# EAGLE board CircularControllerSensors (EAGLE 8.0.0)
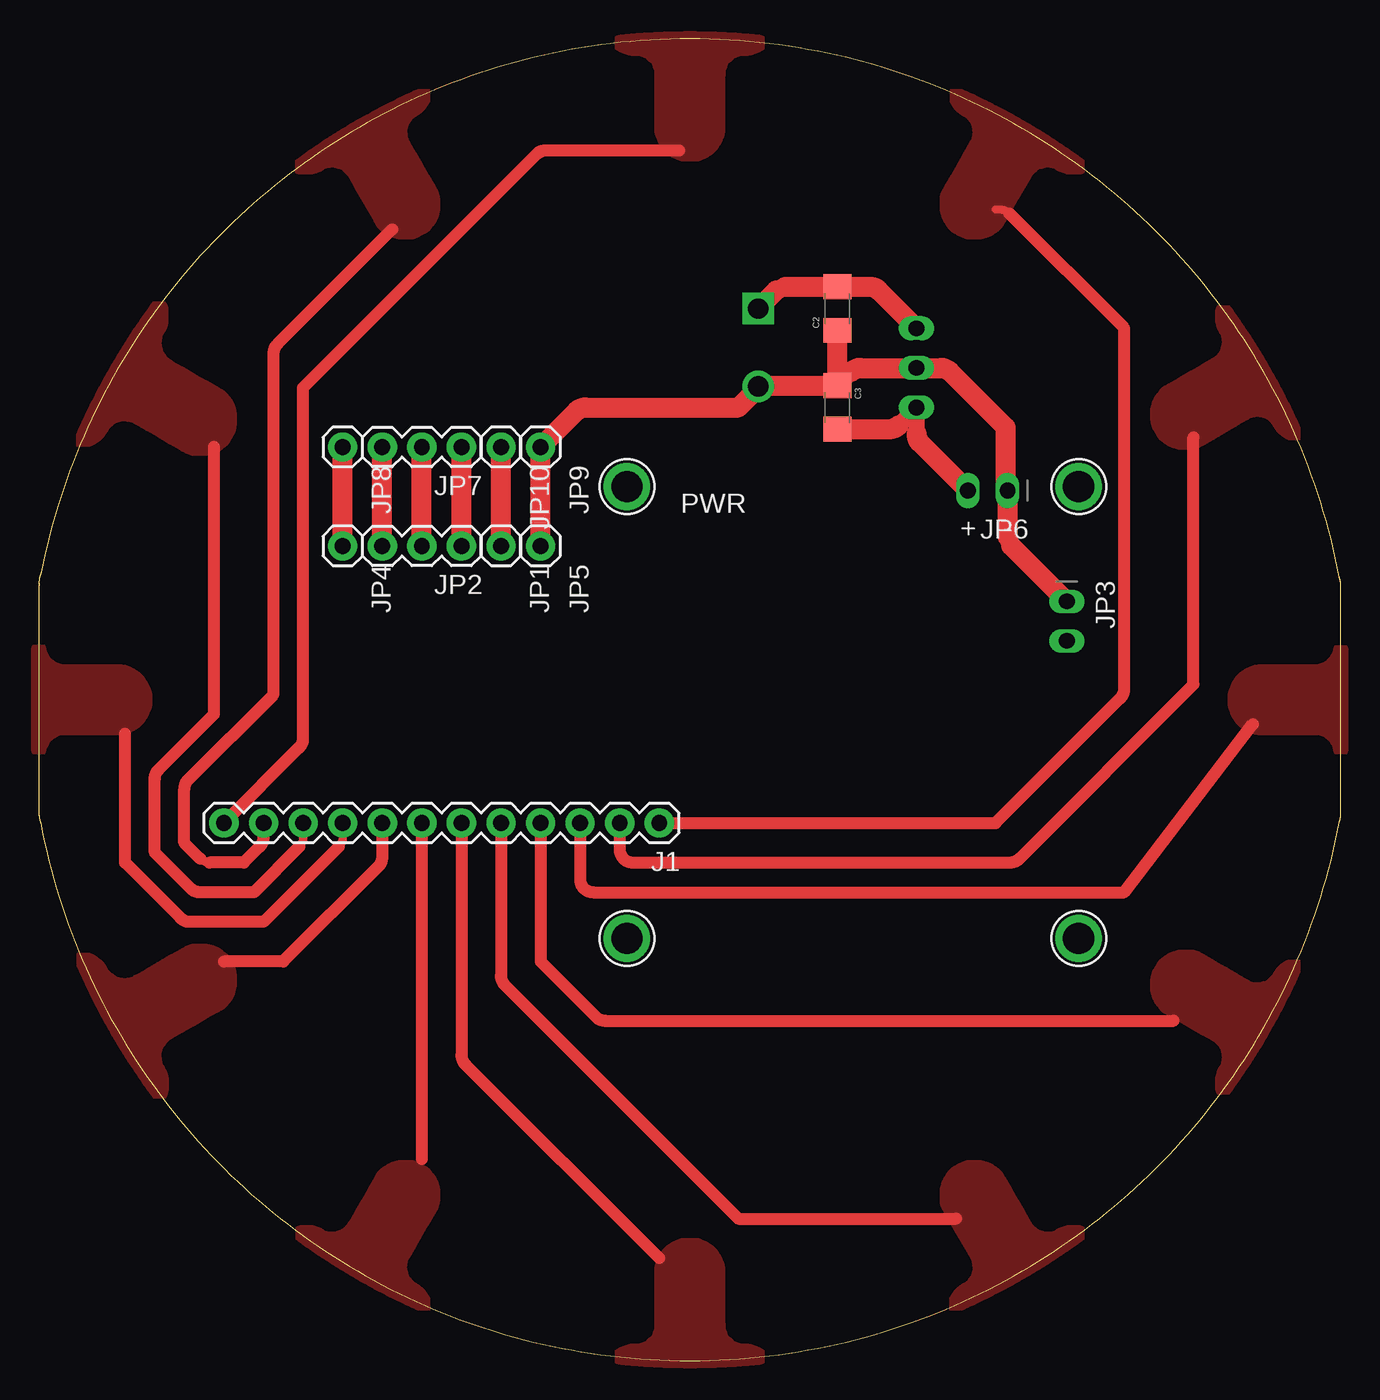
[diagram p0: board, top side]
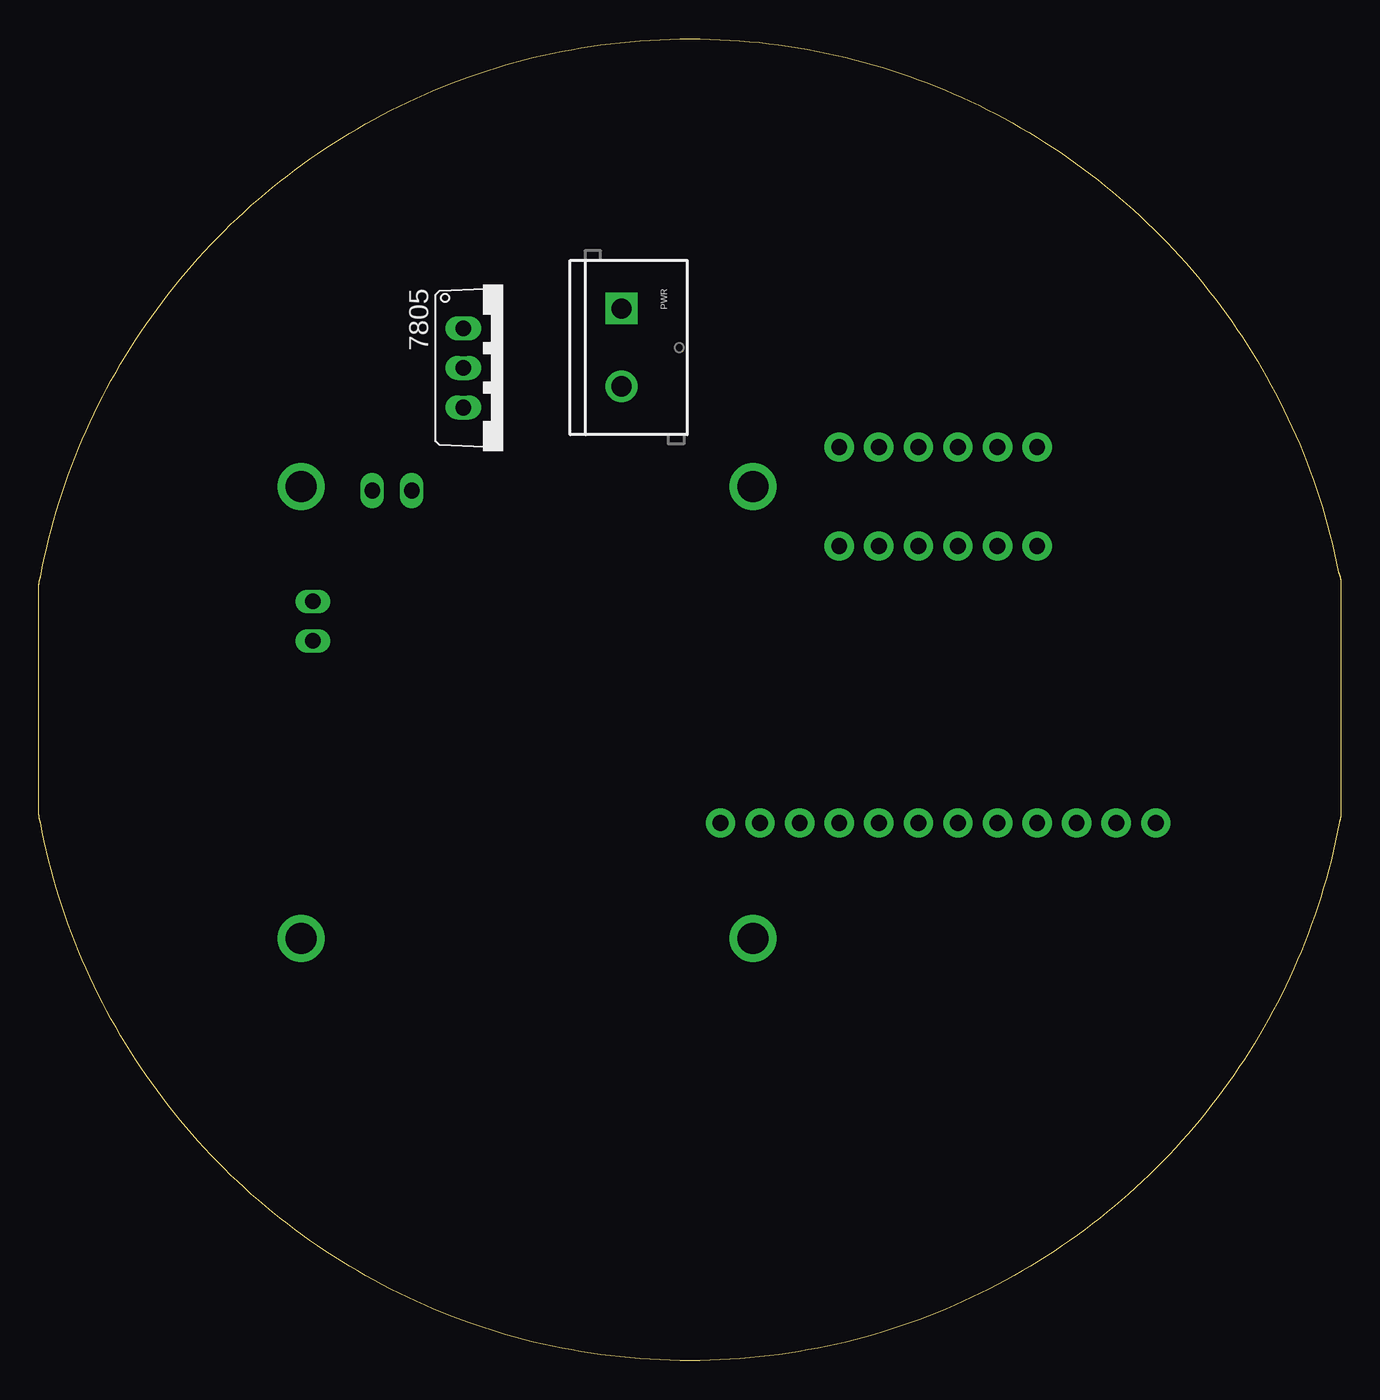
[diagram p1: board, bottom side, seen from below]

Size 83.57 x 84.83 mm. Coordinates in mm from the lower left corner, seen from the top.
Outline: 0.01,49.81 0.01,49.81 0.01,49.81 0.01,49.81 0.01,49.82 0.01,49.82 0.01,49.82 0.01,49.82 0.01,49.82 0.01,49.82 0.01,49.82 0.01,49.83 0.01,49.83 0.01,49.83 0.01,49.83 0.01,49.83 0.01,49.84 0.01,49.84 0.01,49.84 0.01,49.84 0.01,49.84 0.01,49.85 0.01,49.85 0.01,49.85 0.01,49.85 0.01,49.86 0.01,49.86 0.01,49.86 0.01,49.86 0,49.87 0,49.87 0,49.87 0,49.87 0,49.87 0,49.88 0,49.88 0,49.88 0,49.88 0,49.89 0,49.89 0,49.89 0,49.89 0,49.89 0,49.89 0,49.89 0,49.9 0,49.9 0,49.9 0,49.9 0,49.9 0,49.9 0,49.91 0,49.91 0,49.91 0,49.91 0,49.91 0,49.92 0,49.92 0,49.94 0,49.95 0,49.96 0,49.97 0,49.97 0,49.98 0,49.99 0,50 0,50.01 0,50.03 0,50.04 0,50.04 0,50.05 0.01,50.06 0.01,50.07 0.01,50.07 0.01,50.08 0.01,50.09 0.01,50.1 0.01,50.1 0.01,50.11 0.01,50.12 0.01,50.13 0.01,50.13 0.01,50.14 0.02,50.15 0.02,50.16 0.02,50.17 0.02,50.18 0.02,50.18 0.02,50.19 0.03,50.21 0.03,50.21 0.03,50.22 0.03,50.23 0.03,50.24 0.03,50.25 0.04,50.26 0.04,50.26 0.04,50.27 0.04,50.28 0.04,50.29 0.04,50.29 0.05,50.3 0.05,50.31 0.05,50.31 0.05,50.32 0.05,50.33 0.06,50.34 0.06,50.34 0.06,50.35 0.06,50.36 0.06,50.36 0.07,50.37 0.07,50.38 0.07,50.39 0.07,50.39 0.07,50.4 0.08,50.41 0.08,50.41 0.08,50.42 0.08,50.43 0.09,50.43 0.09,50.44 0.09,50.45 0.09,50.45 0.1,50.46 0.1,50.47 0.1,50.48 0.11,50.49 0.11,50.5 0.11,50.5 0.11,50.51 0.12,50.52 0.12,50.53 0.13,50.54 0.13,50.54 0.13,50.55 0.13,50.56 0.14,50.57 0.14,50.58 0.15,50.58 0.15,50.59 0.15,50.6 0.15,50.6 0.16,50.61 0.16,50.62 0.28,51.22 0.41,51.83 0.56,52.43 0.7,53.03 0.86,53.62 1.2,54.8 1.38,55.39 1.58,55.97 1.77,56.54 1.98,57.12 2.2,57.68 2.42,58.25 2.65,58.81 2.89,59.37 3.13,59.92 3.39,60.47 3.65,61.01 3.92,61.56 4.19,62.09 4.48,62.62 4.77,63.15 5.07,63.67 5.38,64.19 5.68,64.7 6,65.21 6.33,65.71 6.66,66.21 7,66.71 7.35,67.19 7.7,67.68 8.06,68.16 8.43,68.63 8.8,69.1 9.18,69.56 9.57,70.01 9.96,70.47 10.36,70.91 10.77,71.35 11.17,71.78 11.59,72.21 12.02,72.63 12.44,73.05 12.88,73.46 13.32,73.86 13.76,74.26 14.21,74.65 14.67,75.04 15.13,75.42 15.6,75.79 16.07,76.15 16.55,76.52 17.03,76.87 17.52,77.21 18.01,77.56 18.51,77.89 19.02,78.21 19.53,78.53 20.04,78.85 20.56,79.15 21.08,79.45 21.61,79.74 22.14,80.02 22.67,80.3 23.21,80.57 23.76,80.82 24.31,81.08 24.86,81.33 25.42,81.56 25.98,81.79 26.55,82.02 27.12,82.23 27.69,82.44 28.27,82.64 28.85,82.82 29.43,83.01 30.02,83.18 30.61,83.35 31.2,83.51 31.8,83.66 32.41,83.79 33.01,83.93 33.62,84.05 34.23,84.16 34.84,84.27 35.46,84.37 36.08,84.45 36.7,84.54 37.33,84.61 37.96,84.66 38.59,84.72 39.22,84.76 39.86,84.79 40.5,84.82 41.14,84.83 42.43,84.83 43.07,84.82 43.72,84.79 44.36,84.76 44.99,84.72 45.63,84.66 46.26,84.6 46.89,84.53 47.51,84.45 48.14,84.36 48.76,84.27 49.38,84.15 49.99,84.04 50.6,83.92 51.21,83.78 51.81,83.64 52.42,83.49 53.61,83.17 54.2,82.99 54.78,82.8 55.37,82.61 55.95,82.41 57.1,81.99 57.67,81.76 58.23,81.53 58.79,81.29 59.35,81.04 59.9,80.78 60.44,80.52 60.99,80.25 61.52,79.97 62.06,79.68 62.59,79.39 63.11,79.09 63.63,78.78 64.15,78.47 64.66,78.14 65.16,77.82 65.66,77.48 66.16,77.13 66.65,76.79 67.13,76.43 67.61,76.06 68.09,75.7 68.56,75.32 69.02,74.93 69.48,74.55 69.93,74.15 70.37,73.75 70.82,73.34 71.25,72.93 71.68,72.5 72.1,72.08 72.52,71.65 72.93,71.21 73.33,70.77 73.73,70.32 74.12,69.86 74.51,69.4 74.89,68.93 75.26,68.46 75.63,67.99 75.99,67.5 76.34,67.01 76.69,66.52 77.03,66.02 77.36,65.52 77.68,65.01 78,64.5 78.31,63.98 78.62,63.46 78.92,62.93 79.2,62.4 79.49,61.87 79.76,61.32 80.02,60.78 80.29,60.23 80.54,59.68 80.78,59.12 81.02,58.56 81.25,57.99 81.46,57.42 81.68,56.85 81.89,56.27 82.08,55.68 82.27,55.1 82.45,54.51 82.62,53.92 82.78,53.32 82.94,52.72 83.08,52.12 83.22,51.51 83.35,50.9 83.46,50.29 83.47,50.28 83.47,50.28 83.47,50.27 83.47,50.27 83.47,50.26 83.48,50.26 83.48,50.25 83.48,50.24 83.48,50.24 83.48,50.23 83.49,50.22 83.49,50.22 83.49,50.21 83.49,50.21 83.5,50.2 83.5,50.19 83.5,50.19 83.5,50.18 83.5,50.17 83.5,50.17 83.51,50.16 83.51,50.15 83.51,50.15 83.51,50.14 83.51,50.14 83.52,50.13 83.52,50.12 83.52,50.11 83.52,50.11 83.52,50.1 83.52,50.1 83.52,50.09 83.53,50.09 83.53,50.08 83.53,50.08 83.53,50.07 83.53,50.06 83.53,50.05 83.53,50.05 83.54,50.04 83.54,50.04 83.54,50.02 83.54,50.02 83.54,50.01 83.54,50.01 83.54,50 83.54,50 83.55,49.98 83.55,49.98 83.55,49.97 83.55,49.97 83.55,49.96 83.55,49.96 83.55,49.95 83.55,49.95 83.55,49.94 83.55,49.93 83.55,49.93 83.55,49.92 83.56,49.92 83.56,49.91 83.56,49.9 83.56,49.9 83.56,49.89 83.56,49.89 83.56,49.88 83.56,49.88 83.56,49.87 83.56,49.86 83.56,49.86 83.56,49.85 83.56,49.84 83.56,49.84 83.56,49.83 83.56,49.82 83.56,49.82 83.56,49.81 83.56,49.8 83.56,49.79 83.57,49.79 83.57,49.76 83.57,49.76 83.57,35.07 83.57,35.07 83.57,35.04 83.56,35.04 83.56,35.03 83.56,35.03 83.56,35.01 83.56,35.01 83.56,34.99 83.56,34.99 83.56,34.98 83.56,34.97 83.56,34.97 83.56,34.96 83.56,34.95 83.56,34.94 83.56,34.94 83.56,34.93 83.56,34.93 83.56,34.92 83.56,34.92 83.55,34.91 83.55,34.9 83.55,34.9 83.55,34.89 83.55,34.89 83.55,34.88 83.55,34.88 83.55,34.87 83.55,34.86 83.55,34.86 83.55,34.85 83.55,34.85 83.54,34.84 83.54,34.83 83.54,34.82 83.54,34.81 83.54,34.81 83.54,34.8 83.54,34.8 83.54,34.79 83.53,34.78 83.53,34.78 83.53,34.77 83.53,34.76 83.53,34.76 83.53,34.75 83.53,34.75 83.52,34.74 83.52,34.73 83.52,34.73 83.52,34.72 83.52,34.71 83.52,34.71 83.51,34.7 83.51,34.69 83.51,34.68 83.51,34.68 83.51,34.67 83.5,34.66 83.5,34.65 83.5,34.64 83.5,34.64 83.49,34.63 83.49,34.62 83.49,34.62 83.49,34.61 83.49,34.6 83.48,34.6 83.48,34.59 83.48,34.59 83.48,34.58 83.48,34.58 83.47,34.57 83.47,34.56 83.47,34.56 83.47,34.55 83.46,34.54 83.35,33.93 83.22,33.32 82.94,32.11 82.78,31.51 82.62,30.92 82.45,30.32 82.27,29.73 82.08,29.15 81.89,28.56 81.68,27.99 81.46,27.41 81.25,26.84 81.02,26.28 80.78,25.72 80.54,25.16 80.29,24.6 80.02,24.05 79.76,23.51 79.49,22.97 79.2,22.43 78.92,21.9 78.62,21.37 78.31,20.85 78,20.33 77.68,19.82 77.36,19.31 77.03,18.81 76.69,18.31 76.34,17.82 75.99,17.33 75.63,16.85 75.26,16.37 74.89,15.9 74.51,15.43 74.12,14.97 73.73,14.51 73.33,14.07 72.93,13.62 72.52,13.18 72.1,12.75 71.68,12.33 71.25,11.9 70.82,11.49 70.37,11.09 69.93,10.68 69.48,10.28 69.02,9.9 68.56,9.51 68.09,9.14 67.61,8.77 67.13,8.4 66.65,8.05 66.16,7.7 65.66,7.35 65.16,7.02 64.66,6.69 64.15,6.36 63.63,6.05 63.11,5.75 62.59,5.44 62.06,5.15 61.52,4.86 60.99,4.58 60.44,4.31 59.9,4.05 59.35,3.79 58.79,3.54 58.23,3.31 57.67,3.07 57.1,2.84 55.95,2.42 55.37,2.22 54.2,1.84 53.61,1.67 53.01,1.5 52.42,1.34 51.81,1.19 51.21,1.05 50.6,0.91 49.99,0.79 49.38,0.68 48.76,0.57 48.14,0.47 47.51,0.38 46.89,0.3 46.26,0.23 45.63,0.17 44.99,0.11 44.36,0.07 43.72,0.04 43.07,0.01 42.43,0 41.13,0 40.49,0.01 39.85,0.04 39.21,0.07 38.57,0.11 37.94,0.17 37.3,0.23 36.68,0.3 36.05,0.38 35.43,0.47 34.81,0.57 34.19,0.68 33.57,0.79 32.96,0.91 32.36,1.05 31.75,1.19 31.15,1.34 30.55,1.5 29.96,1.67 29.36,1.84 28.19,2.22 27.61,2.42 27.04,2.63 26.47,2.84 25.9,3.07 25.34,3.31 24.77,3.54 24.22,3.79 23.67,4.05 23.12,4.31 22.58,4.58 22.04,4.86 21.51,5.15 20.98,5.44 20.45,5.75 19.93,6.05 19.42,6.36 18.91,6.69 18.4,7.02 17.9,7.35 17.41,7.7 16.92,8.05 16.43,8.4 15.96,8.77 15.48,9.14 15.01,9.51 14.55,9.9 14.09,10.28 13.64,10.68 13.19,11.09 12.75,11.49 12.31,11.9 11.89,12.33 11.46,12.75 11.05,13.18 10.64,13.62 10.23,14.07 9.83,14.51 9.44,14.97 9.05,15.43 8.67,15.9 8.31,16.37 7.94,16.85 7.58,17.33 7.23,17.82 6.88,18.31 6.54,18.81 6.21,19.31 5.88,19.82 5.56,20.33 4.95,21.37 4.65,21.9 4.36,22.43 4.08,22.97 3.8,23.51 3.28,24.6 3.03,25.16 2.79,25.72 2.55,26.28 2.32,26.84 2.1,27.41 1.88,27.99 1.68,28.56 1.49,29.15 1.3,29.73 1.12,30.32 0.95,30.92 0.78,31.51 0.63,32.11 0.49,32.72 0.34,33.32 0.22,33.93 0.1,34.54 0.1,34.55 0.1,34.56 0.09,34.56 0.09,34.57 0.09,34.57 0.09,34.58 0.09,34.58 0.09,34.59 0.08,34.59 0.08,34.6 0.08,34.6 0.08,34.61 0.08,34.61 0.07,34.62 0.07,34.62 0.07,34.63 0.07,34.64 0.07,34.65 0.06,34.65 0.06,34.66 0.06,34.66 0.06,34.67 0.06,34.67 0.06,34.68 0.06,34.68 0.05,34.69 0.05,34.7 0.05,34.7 0.05,34.71 0.05,34.72 0.04,34.73 0.04,34.73 0.04,34.74 0.04,34.75 0.04,34.75 0.04,34.76 0.04,34.76 0.03,34.78 0.03,34.79 0.03,34.8 0.03,34.8 0.03,34.81 0.02,34.82 0.02,34.82 0.02,34.83 0.02,34.84 0.02,34.85 0.02,34.85 0.02,34.86 0.02,34.86 0.02,34.87 0.01,34.88 0.01,34.89 0.01,34.89 0.01,34.9 0.01,34.9 0.01,34.91 0.01,34.92 0.01,34.92 0.01,34.93 0.01,34.93 0.01,34.94 0.01,34.94 0.01,34.95 0.01,34.96 0,34.96 0,34.97 0,34.97 0,34.98 0,34.99 0,34.99 0,35 0,35 0,35.01 0,35.02 0,35.03 0,35.03 0,35.04 0,35.04 0,35.06 0,35.07 0,35.07 0,49.75 0,49.75
Outline: 0.01,49.81 0.01,49.81
Outline: 0.01,49.81 0.01,49.81 0.01,49.81
Outline: 0.01,49.81 0.01,49.81
Outline: 0.01,49.81 0.01,49.81 0.01,49.81
Outline: 0.01,49.81 0.01,49.81
Outline: 0.01,49.81 0.01,49.8 0.01,49.8
Outline: 0.01,49.8 0.01,49.8
Outline: 0.01,49.8 0.01,49.8 0.01,49.8
Outline: 0.01,49.8 0.01,49.8
Outline: 0.01,49.8 0.01,49.8 0.01,49.8
Outline: 0.01,49.8 0.01,49.8
Outline: 0.01,49.8 0.01,49.8 0.01,49.8
Outline: 0.01,49.8 0.01,49.8
Outline: 0.01,49.8 0.01,49.8 0.01,49.8 0.01,49.8 0.01,49.79 0.01,49.79
Outline: 0.01,49.79 0.01,49.79
Outline: 0.01,49.79 0.01,49.79 0.01,49.79 0.01,49.79 0.01,49.79
Outline: 0.01,49.79 0.01,49.79
Outline: 0.01,49.79 0.01,49.79 0.01,49.79
Outline: 0.01,49.79 0.01,49.79
Outline: 0.01,49.79 0.01,49.79 0.01,49.79
Outline: 0.01,49.79 0.01,49.79
Outline: 0.01,49.79 0.01,49.78 0.01,49.78
Outline: 0.01,49.78 0.01,49.78
Outline: 0.01,49.78 0.01,49.78 0.01,49.78
Outline: 0.01,49.78 0.01,49.78
Outline: 0.01,49.78 0.01,49.78 0.01,49.78 0.01,49.78
Outline: 0.01,49.78 0.01,49.78
Outline: 0.01,49.78 0.01,49.78
Outline: 0.01,49.78 0.01,49.78
Outline: 0.01,49.78 0.01,49.78 0.01,49.78 0,49.78 0,49.77 0,49.77
Outline: 0,49.77 0,49.77
Outline: 0,49.77 0,49.77 0,49.77
Outline: 0,49.77 0,49.77
Outline: 0,49.77 0,49.77 0,49.77 0,49.77
Outline: 0,49.77 0,49.77
Outline: 0,49.77 0,49.77
Outline: 0,49.77 0,49.77
Outline: 0,49.77 0,49.77 0,49.77 0,49.77 0,49.76 0,49.76
Outline: 0,49.76 0,49.76
Outline: 0,49.76 0,49.76 0,49.76
Outline: 0,49.76 0,49.76
Outline: 0,49.76 0,49.76 0,49.76
Outline: 0,49.76 0,49.76
Outline: 0,49.76 0,49.76 0,49.76
Outline: 0,49.76 0,49.76
Outline: 0,49.76 0,49.76 0,49.76
Outline: 0,49.76 0,49.76
Outline: 0,49.76 0,49.75 0,49.75
Outline: 0,49.75 0,49.75
Outline: 0,49.75 0,49.75 0,49.75
Outline: 0,49.75 0,49.75
Outline: 0,49.75 0,49.75
Outline: 0,49.75 0,49.75
Outline: 0,49.75 0,49.75 0,49.75 0,49.75
Outline: 0,49.75 0,49.75
Copper layers (1*16): Top 0.035mm / dielectric 1.5mm / Bottom 0.035mm
Design rules "OthermillDRC_1_64_v2": minimum track width 16mil, minimum drill 31mil, track to track 0.39878125mm, track to pad 0.39878125mm, pad to pad 0.39878125mm, via to via 0.39878125mm, smd to smd 0mil, copper to edge 0mil, drill to drill 1mil, minimum pad ring 0mil, minimum via ring 15mil, stop-mask expansion 1mil, vias tented up to drill 30mil, thermal gap 10mil
Net classes: 0 default: width 0.203 mm
bRestrict: area 61.3,55.6 to 61.4,56.1; area 63.1,55.6 to 63.2,56.1

## Footprints (pad centres in the part's own frame; a part is rotated, then mirrored left to right if it is on the bottom)
TO220V = drill 1.016 long: 1 -2.54,-2.54; 2 0,-2.54; 3 2.54,-2.54
1206 = smd 1.6 x 1.8: 1 -1.4,0; 2 1.4,0
1X12 = drill 1.016 pad 1.88: 1 0,0; 2 2.54,0; 3 5.08,0; 4 7.62,0; 5 10.16,0; 6 12.7,0; 7 15.24,0; 8 17.78,0; 9 20.32,0; 10 22.86,0; 11 25.4,0; 12 27.94,0
1X01 = drill 1.016 pad 1.88: 1 0,0
1X03 = drill 1.016 pad 1.88: 1 0,0; 2 2.54,0; 3 5.08,0
1X02_OVAL = drill 1 long: 1 -1.27,0; 2 1.27,0
SCREWTERMINAL-5MM-2 = drill 1.3 pad 2.032 square: 1 0,0 | drill 1.3 pad 2.032: 2 5,0
MOUNTINGHOLE_2.0_PLATED = drill 2 pad 3: P$1 0,0

## Placement (x,y rotation side)
7805  7805TV  [TO220V]  53.79,63.72 270 bottom
C2  10uF  [1206]  51.25,67.53 90 top
C3  1uF  [1206]  51.25,61.18 270 top
J1  [1X12]  39.82,34.51 180 top
JP1  ADDR  [1X01]  29.66,52.29 270 top
JP2  I2C  [1X03]  27.12,52.29 180 top
JP3  LOAD_0.1  [1X02_OVAL]  65.98,47.46 270 top
JP4  3.3V  [1X01]  19.5,52.29 270 top
JP5  GND  [1X01]  32.2,52.29 270 top
JP6  PWR_IN_0.1  [1X02_OVAL]  60.9,55.84 180 top
JP7  I2C  [1X03]  27.12,58.64 180 top
JP8  3.3V  [1X01]  19.5,58.64 270 top
JP9  GND  [1X01]  32.2,58.64 270 top
JP10  ADDR  [1X01]  29.66,58.64 270 top
PWR  [SCREWTERMINAL-5MM-2]  46.17,67.53 270 bottom
U$11  MOUNTINGHOLE2.0  [MOUNTINGHOLE_2.0_PLATED]  66.74,27.09 0 top
U$16  MOUNTINGHOLE2.0  [MOUNTINGHOLE_2.0_PLATED]  66.74,56.09 0 top
U$18  MOUNTINGHOLE2.0  [MOUNTINGHOLE_2.0_PLATED]  37.74,56.09 0 top
U$19  MOUNTINGHOLE2.0  [MOUNTINGHOLE_2.0_PLATED]  37.74,27.09 0 top

## Library data of the parts
7805 = linear
C2 C3 = SparkFun-Capacitors; PROD_ID: CAP-10057
J1 = SparkFun-Connectors
JP1 JP2 JP4 JP5 JP7-JP10 = SparkFun
JP3 JP6 U$11 U$16 U$18 U$19 = microbuilder
PWR = SparkFun-Connectors; STOREFRONT_ID: PRT-08432

## Nets
3.3V: JP4.1 JP8.1
3.7V: JP3.2
5V: 7805.3 C3.2 JP6.2
ADDR: JP1.1 JP10.1
CAP1: J1.1
CAP2: J1.2
CAP3: J1.3
CAP4: J1.4
CAP5: J1.5
CAP6: J1.6
CAP7: J1.7
CAP8: J1.8
CAP9: J1.9
CAP10: J1.10
CAP11: J1.11
CAP12: J1.12
GND: 7805.2 C2.1 C3.1 JP3.1 JP5.1 JP6.1 JP9.1 PWR.2
IRQ: JP2.1 JP7.1
SCL: JP2.2 JP7.2
SDA: JP2.3 JP7.3
VIN: 7805.1 C2.2 PWR.1

## Tracks (layer width: path | path; a pad name or v marks a point on that pad's centre or on a via)
3.3V
  Top 1.27: JP4.1 JP8.1
5V
  Top 1.016: 55.17,60.02 7805.3 56.33,59.49
  Top 1.27: C3.2 54.58,59.78 arc45 55.17,60.02 | 56.33,59.49 arc45 56.57,58.9 JP6.2
ADDR
  Top 1.27: JP1.1 JP10.1
CAP1
  Top 0.508: 62.29,73.63 arc45 61.7,73.88 61.41,73.88
  Top 0.762: J1.1 61.41,34.51 69.42,42.52 arc45 69.66,43.11 69.66,66.26 62.29,73.63
  pour Top: 66.82,76.65 66.76,76.69 66.71,76.73 66.65,76.77 66.6,76.81 66.54,76.85 66.49,76.89 66.43,76.93 66.38,76.97 66.32,77.01 66.27,77.05 66.21,77.09 66.16,77.13 66.03,77.22 65.91,77.31 65.79,77.39 65.66,77.48 65.54,77.56 65.41,77.65 65.29,77.73 65.16,77.81 65.03,77.9 64.91,77.98 64.78,78.06 64.66,78.14 64.53,78.22 64.4,78.3 64.27,78.38 64.15,78.46 64.02,78.54 63.89,78.62 63.76,78.7 63.63,78.78 63.5,78.86 63.37,78.93 63.24,79.01 63.11,79.09 62.98,79.16 62.85,79.24 62.72,79.31 62.59,79.39 62.45,79.46 62.19,79.61 62.06,79.68 61.92,79.75 61.79,79.83 61.66,79.9 61.52,79.97 61.39,80.04 61.26,80.11 61.12,80.18 60.99,80.25 60.85,80.31 60.58,80.45 60.44,80.52 60.31,80.58 60.17,80.65 60.03,80.72 59.9,80.78 59.81,80.82 59.72,80.86 59.63,80.9 59.54,80.95 59.45,80.99 59.36,81.03 59.27,81.07 59.09,81.14 59,81.18 58.91,81.22 58.82,81.26 58.85,81.16 58.88,81.07 58.93,80.98 58.98,80.89 59.03,80.8 59.1,80.71 59.16,80.63 59.23,80.55 59.31,80.48 59.39,80.41 59.48,80.35 59.58,80.29 59.58,80.29 59.57,80.29 59.57,80.29 59.57,80.29 59.77,80.18 59.94,80.02 60.2,79.68 60.3,79.48 60.35,79.27 60.41,79.07 60.42,78.85 60.4,78.63 60.37,78.42 60.3,78.2 60.18,78 60.18,78 60.19,78 60.19,78 60.19,78 59.77,77.28 59.36,76.55 58.94,75.83 58.52,75.11 58.4,74.9 58.33,74.67 58.3,74.44 58.27,74.21 58.28,73.98 58.34,73.76 58.4,73.53 58.5,73.32 58.64,73.14 58.78,72.95 58.96,72.79 59.18,72.67 59.39,72.55 59.62,72.47 59.85,72.44 60.08,72.42 60.31,72.43 60.53,72.49 60.75,72.55 60.96,72.65 61.15,72.79 61.33,72.93 61.49,73.11 61.62,73.32 61.62,73.33 61.62,73.33 61.63,73.34 61.63,73.34 61.63,73.35 61.63,73.35 61.63,73.36 61.64,73.36 61.64,73.37 61.64,73.37 61.64,73.38 61.64,73.38 62.05,74.09 62.46,74.8 62.87,75.51 63.28,76.22 63.4,76.42 63.55,76.58 63.72,76.72 63.89,76.85 64.09,76.94 64.3,77 64.51,77.05 64.72,77.07 65.16,77.02 65.37,76.95 65.57,76.83 65.57,76.83 65.58,76.83 65.58,76.83 65.58,76.83 65.58,76.83 65.58,76.83 65.58,76.83 65.58,76.83 65.58,76.83 65.58,76.83 65.58,76.83 65.58,76.83 65.58,76.83 65.58,76.83 65.58,76.83 65.58,76.83 65.58,76.83 65.58,76.83 65.58,76.83 65.58,76.83 65.58,76.83 65.58,76.82 65.58,76.82 65.59,76.82 65.59,76.82 65.59,76.82 65.59,76.82 65.68,76.77 65.78,76.72 65.89,76.69 65.99,76.65 66.09,76.63 66.19,76.62 66.3,76.6 66.4,76.6 66.51,76.6 66.61,76.61 66.71,76.62
CAP2
  Top 0.762: J1.2 37.28,32.8 arc90 38.12,31.97 62.33,31.97 arc45 62.92,32.21 74.11,43.4 74.11,59.27
  pour Top: 80.02,60.78 79.96,60.91 79.89,61.05 79.83,61.19 79.76,61.32 79.69,61.46 79.62,61.59 79.55,61.73 79.48,61.86 79.41,62 79.34,62.13 79.27,62.27 79.2,62.4 79.13,62.53 79.06,62.67 78.99,62.8 78.91,62.93 78.84,63.06 78.76,63.2 78.69,63.33 78.62,63.46 78.54,63.59 78.46,63.72 78.39,63.85 78.31,63.98 78.23,64.11 78.16,64.24 78.08,64.37 78,64.5 77.92,64.63 77.84,64.76 77.76,64.88 77.68,65.01 77.6,65.14 77.52,65.27 77.44,65.39 77.36,65.52 77.27,65.65 77.19,65.77 77.11,65.9 77.02,66.02 76.94,66.15 76.86,66.27 76.77,66.4 76.69,66.52 76.6,66.64 76.51,66.77 76.43,66.89 76.34,67.01 76.31,67.05 76.29,67.08 76.26,67.12 76.23,67.16 76.21,67.19 76.18,67.23 76.15,67.26 76.13,67.3 76.1,67.33 76.07,67.37 76.05,67.4 76.02,67.44 76,67.34 75.98,67.23 75.98,67.13 75.97,67.03 75.98,66.92 75.99,66.82 76,66.72 76.03,66.61 76.06,66.51 76.1,66.41 76.14,66.31 76.19,66.21 76.19,66.21 76.19,66.21 76.19,66.21 76.19,66.21 76.31,66.01 76.38,65.8 76.4,65.58 76.43,65.36 76.41,65.15 76.36,64.94 76.3,64.73 76.21,64.54 76.07,64.36 75.94,64.19 75.78,64.04 75.58,63.92 75.58,63.92 75.58,63.92 75.58,63.92 75.58,63.92 74.86,63.5 74.13,63.08 73.41,62.67 72.69,62.25 72.48,62.13 72.3,61.97 72.16,61.78 72.02,61.6 71.92,61.39 71.8,60.94 71.78,60.71 71.81,60.48 71.84,60.25 71.91,60.02 72.04,59.81 72.16,59.6 72.32,59.42 72.51,59.28 72.69,59.14 72.9,59.04 73.12,58.98 73.34,58.92 73.58,58.9 73.81,58.93 74.04,58.96 74.26,59.03 74.48,59.16 74.48,59.16 74.49,59.16 74.49,59.16 74.5,59.17 74.5,59.17 74.5,59.17 74.51,59.18 74.51,59.18 74.52,59.18 74.52,59.19 74.53,59.19 74.53,59.19 75.24,59.6 75.95,60.01 76.65,60.42 77.36,60.83 77.56,60.94 77.78,61.01 77.99,61.04 78.21,61.07 78.43,61.05 78.64,61 78.84,60.94 79.04,60.84 79.22,60.71 79.39,60.58 79.54,60.41 79.66,60.21 79.66,60.21 79.66,60.21 79.66,60.21 79.66,60.21 79.66,60.21 79.66,60.21 79.66,60.21 79.66,60.21 79.66,60.21 79.66,60.21 79.66,60.21 79.66,60.21 79.66,60.21 79.66,60.21 79.66,60.21 79.66,60.21 79.66,60.21 79.66,60.21 79.66,60.21 79.66,60.21 79.66,60.21 79.66,60.2 79.66,60.2 79.66,60.2 79.66,60.2 79.66,60.2 79.66,60.2 79.72,60.11 79.78,60.02 79.92,59.86 80,59.78 80.08,59.72 80.17,59.66 80.26,59.6 80.35,59.55 80.44,59.51 80.54,59.47 80.63,59.44 80.58,59.55 80.54,59.66 80.49,59.77 80.44,59.89 80.39,60 80.28,60.22 80.23,60.33 80.18,60.44 80.13,60.56 80.08,60.67
CAP3
  Top 0.762: J1.3 34.74,30.9 arc90 35.58,30.06 69.66,30.06 77.92,40.86
  pour Top: 83.57,39.23 83.57,45.62 83.53,45.42 83.47,45.23 83.37,45.06 83.28,44.89 83.15,44.74 83.01,44.62 82.86,44.49 82.69,44.39 82.51,44.32 82.32,44.25 82.12,44.21 81.91,44.21 81.91,44.2 78.58,44.2 78.33,44.2 78.1,44.15 77.88,44.06 77.67,43.97 77.48,43.84 77.32,43.68 77.15,43.52 77.02,43.33 76.84,42.9 76.79,42.66 76.79,42.17 76.84,41.93 76.93,41.72 77.02,41.51 77.15,41.31 77.48,40.99 77.67,40.86 77.88,40.77 78.1,40.68 78.33,40.63 78.58,40.63 78.59,40.63 78.59,40.63 78.6,40.63 78.6,40.63 78.61,40.63 78.61,40.63 78.62,40.63 78.62,40.63 78.63,40.63 78.63,40.64 78.64,40.64 79.46,40.64 81.1,40.64 82.12,40.64 82.32,40.6 82.51,40.53 82.69,40.46 82.86,40.36 83,40.23 83.15,40.11 83.27,39.96 83.37,39.79 83.47,39.62 83.53,39.43
CAP4
  Top 0.762: J1.4 32.2,25.62 35.76,22.05 arc45 36.35,21.81 72.84,21.81
  pour Top: 78.31,20.85 78.39,20.98 78.46,21.11 78.54,21.24 78.62,21.37 78.69,21.5 78.76,21.64 78.84,21.77 78.91,21.9 78.99,22.03 79.06,22.17 79.13,22.3 79.2,22.43 79.27,22.57 79.34,22.7 79.41,22.83 79.48,22.97 79.55,23.1 79.62,23.24 79.69,23.37 79.76,23.51 79.83,23.65 79.89,23.78 79.96,23.92 80.02,24.05 80.08,24.16 80.13,24.27 80.18,24.38 80.23,24.49 80.28,24.6 80.33,24.72 80.38,24.83 80.43,24.94 80.48,25.05 80.53,25.16 80.58,25.27 80.63,25.38 80.53,25.35 80.43,25.32 80.34,25.27 80.25,25.22 80.16,25.17 80.08,25.1 80,25.04 79.92,24.97 79.85,24.89 79.78,24.81 79.72,24.72 79.66,24.62 79.66,24.62 79.66,24.63 79.66,24.63 79.66,24.63 79.54,24.43 79.39,24.26 79.22,24.13 79.04,24 78.85,23.9 78.64,23.85 78.43,23.79 78.22,23.78 78,23.8 77.78,23.83 77.57,23.9 77.37,24.02 77.37,24.01 77.37,24.01 77.37,24.01 77.36,24.01 76.64,24.43 75.92,24.84 75.2,25.26 74.48,25.68 74.26,25.8 74.04,25.87 73.81,25.9 73.58,25.93 73.34,25.91 73.12,25.86 72.9,25.8 72.69,25.69 72.51,25.56 72.32,25.42 72.16,25.24 72.04,25.02 71.91,24.81 71.84,24.58 71.81,24.35 71.78,24.12 71.8,23.89 71.86,23.67 71.92,23.45 72.02,23.24 72.16,23.05 72.3,22.87 72.48,22.71 72.69,22.58 72.7,22.58 72.71,22.57 72.71,22.57 72.72,22.57 72.72,22.57 72.73,22.57 72.73,22.56 72.74,22.56 72.74,22.56 72.75,22.56 72.75,22.56 73.46,22.15 74.17,21.74 74.87,21.33 75.58,20.92 75.78,20.8 75.95,20.65 76.08,20.48 76.21,20.31 76.31,20.11 76.36,19.9 76.42,19.69 76.44,19.47 76.41,19.26 76.38,19.04 76.31,18.83 76.2,18.62 76.2,18.62 76.2,18.62 76.2,18.62 76.2,18.62 76.2,18.62 76.19,18.62 76.19,18.62 76.19,18.62 76.19,18.62 76.19,18.62 76.19,18.62 76.19,18.62 76.19,18.62 76.19,18.62 76.19,18.62 76.19,18.62 76.19,18.62 76.19,18.62 76.19,18.62 76.19,18.62 76.19,18.62 76.19,18.62 76.19,18.62 76.19,18.62 76.19,18.61 76.19,18.61 76.19,18.61 76.13,18.52 76.09,18.42 76.05,18.31 76.02,18.21 76,18.11 75.98,18 75.97,17.9 75.96,17.8 75.97,17.69 75.98,17.59 75.99,17.48 76.01,17.38 76.04,17.42 76.07,17.46 76.1,17.49 76.12,17.53 76.15,17.57 76.18,17.6 76.2,17.64 76.23,17.67 76.26,17.71 76.29,17.75 76.31,17.78 76.34,17.82 76.43,17.94 76.51,18.07 76.6,18.19 76.69,18.31 76.77,18.44 76.86,18.56 76.94,18.68 77.02,18.81 77.11,18.94 77.19,19.06 77.27,19.19 77.36,19.31 77.44,19.44 77.52,19.57 77.6,19.69 77.68,19.82 77.76,19.95 77.84,20.08 77.92,20.21 78,20.33 78.16,20.59 78.23,20.72
CAP5
  Top 0.762: J1.5 29.66,24.69 arc45 29.9,24.1 44.9,9.11 58.87,9.11
  pour Top: 58.8,3.56 58.9,3.6 58.99,3.64 59.08,3.68 59.17,3.72 59.26,3.76 59.35,3.8 59.44,3.84 59.53,3.89 59.62,3.93 59.72,3.97 59.81,4.01 59.9,4.05 60.03,4.12 60.17,4.18 60.31,4.25 60.44,4.31 60.58,4.38 60.71,4.45 60.85,4.52 60.99,4.59 61.12,4.66 61.26,4.72 61.39,4.79 61.52,4.86 61.66,4.94 61.79,5.01 61.92,5.08 62.06,5.15 62.19,5.22 62.45,5.37 62.59,5.44 62.72,5.52 62.85,5.59 62.98,5.67 63.11,5.75 63.24,5.82 63.37,5.9 63.5,5.98 63.63,6.05 63.76,6.13 63.89,6.21 64.02,6.29 64.15,6.37 64.27,6.45 64.4,6.53 64.53,6.61 64.66,6.69 64.78,6.77 64.91,6.85 65.03,6.94 65.16,7.02 65.29,7.1 65.41,7.19 65.54,7.27 65.66,7.36 65.79,7.44 65.91,7.53 66.03,7.61 66.16,7.7 66.21,7.74 66.27,7.78 66.32,7.82 66.37,7.86 66.43,7.9 66.48,7.94 66.54,7.98 66.59,8.02 66.64,8.06 66.7,8.1 66.75,8.14 66.81,8.18 66.71,8.2 66.6,8.22 66.4,8.23 66.29,8.22 66.19,8.21 66.08,8.2 65.98,8.17 65.78,8.1 65.68,8.06 65.58,8.01 65.58,8.01 65.58,8.01 65.58,8.01 65.58,8.01 65.38,7.89 65.16,7.82 64.95,7.8 64.73,7.77 64.51,7.79 64.31,7.84 64.1,7.9 63.9,7.99 63.73,8.13 63.56,8.26 63.41,8.42 63.29,8.62 63.29,8.62 63.29,8.62 63.29,8.62 63.28,8.62 62.87,9.34 62.45,10.06 62.03,10.79 61.62,11.51 61.49,11.72 61.33,11.9 61.15,12.04 60.96,12.18 60.75,12.28 60.53,12.34 60.31,12.4 60.08,12.42 59.85,12.39 59.62,12.36 59.39,12.29 59.18,12.16 58.96,12.04 58.78,11.88 58.64,11.69 58.5,11.51 58.4,11.3 58.28,10.86 58.27,10.62 58.3,10.39 58.32,10.16 58.4,9.93 58.52,9.72 58.53,9.72 58.53,9.71 58.53,9.7 58.54,9.7 58.54,9.69 58.54,9.69 58.55,9.69 58.55,9.68 58.55,9.68 58.56,9.67 58.56,9.67 58.97,8.96 59.79,7.55 60.19,6.84 60.31,6.64 60.38,6.42 60.41,6.2 60.43,5.99 60.42,5.77 60.36,5.56 60.31,5.35 60.21,5.16 60.08,4.98 59.95,4.81 59.78,4.66 59.58,4.54 59.58,4.54 59.58,4.54 59.58,4.54 59.58,4.54 59.58,4.54 59.58,4.54 59.58,4.54 59.57,4.54 59.57,4.54 59.57,4.54 59.58,4.54 59.58,4.54 59.57,4.54 59.57,4.54 59.57,4.54 59.57,4.54 59.57,4.54 59.57,4.54 59.57,4.54 59.57,4.54 59.57,4.54 59.57,4.54 59.57,4.54 59.47,4.48 59.38,4.42 59.22,4.27 59.15,4.2 59.09,4.11 59.02,4.03 58.97,3.94 58.92,3.85 58.87,3.76 58.83,3.66
CAP6
  Top 0.762: J1.6 27.12,19.61 arc45 27.36,19.02 39.82,6.57
  pour Top: 45.63,0.17 45.68,0.18 45.74,0.18 45.79,0.19 45.85,0.19 45.9,0.2 45.95,0.2 46.01,0.21 46.06,0.21 46.12,0.22 46.17,0.23 46.23,0.23 46.28,0.24 46.21,0.29 46.13,0.35 46.05,0.39 45.98,0.44 45.89,0.47 45.81,0.51 45.72,0.54 45.63,0.56 45.54,0.58 45.44,0.6 45.35,0.6 45.25,0.6 45.25,0.61 45.02,0.61 44.8,0.65 44.6,0.74 44.4,0.83 44.22,0.95 44.07,1.1 43.92,1.25 43.79,1.43 43.71,1.63 43.62,1.83 43.58,2.05 43.58,2.29 43.57,2.29 43.57,5.87 43.52,6.1 43.43,6.32 43.34,6.53 43.21,6.72 43.05,6.88 42.89,7.04 42.69,7.18 42.48,7.27 42.26,7.36 42.03,7.41 41.54,7.41 41.3,7.36 41.09,7.27 40.87,7.18 40.68,7.04 40.52,6.88 40.36,6.72 40.23,6.53 40.14,6.32 40.05,6.1 40,5.87 40,5.61 40,5.61 40,5.6 40,5.6 40,5.59 40,5.59 40,5.58 40,5.58 40,5.57 40,5.57 40,5.56 40,5.55 40,2.05 39.96,1.83 39.87,1.63 39.79,1.43 39.66,1.25 39.51,1.1 39.36,0.95 39.18,0.82 38.98,0.74 38.78,0.65 38.55,0.61 38.32,0.61 38.32,0.61 38.32,0.61 38.32,0.61 38.32,0.6 38.31,0.6 38.31,0.61 38.31,0.61 38.21,0.61 38.12,0.6 38.02,0.58 37.93,0.56 37.84,0.54 37.66,0.48 37.58,0.44 37.5,0.39 37.42,0.35 37.35,0.3 37.27,0.24 37.38,0.23 37.44,0.22 37.49,0.22 37.55,0.21 37.61,0.2 37.66,0.2 37.72,0.19 37.77,0.19 37.83,0.18 37.88,0.18 37.94,0.17 38.1,0.16 38.25,0.14 38.41,0.13 38.57,0.12 38.73,0.11 38.89,0.1 39.05,0.09 39.21,0.08 39.37,0.07 39.53,0.06 39.69,0.05 40.01,0.04 40.17,0.03 40.33,0.02 40.49,0.02 40.65,0.01 40.81,0.01 40.97,0.01 41.14,0 41.3,0 41.46,0 41.62,0 41.94,0 42.11,0 42.27,0 42.43,0 42.59,0.01 42.75,0.01 42.91,0.01 43.07,0.02 43.23,0.02 43.4,0.03 43.56,0.04 43.88,0.05 44.04,0.06 44.2,0.07 44.36,0.08 44.52,0.09 44.67,0.1 44.83,0.11 44.99,0.12 45.15,0.13 45.31,0.14 45.47,0.16
CAP7
  Top 0.762: J1.7 24.58,12.92
  pour Top: 24.39,12.16 24.18,12.29 23.95,12.36 23.72,12.39 23.49,12.42 23.25,12.4 23.03,12.34 22.81,12.28 22.6,12.18 22.42,12.04 22.23,11.9 22.07,11.72 21.95,11.51 21.53,10.79 21.11,10.07 20.7,9.34 20.28,8.62 20.28,8.62 20.28,8.62 20.28,8.62 20.28,8.62 20.16,8.42 20.01,8.26 19.84,8.12 19.66,7.99 19.47,7.9 19.26,7.84 19.05,7.79 18.83,7.77 18.62,7.8 18.4,7.82 18.19,7.89 17.99,8.01 17.99,8.01 17.99,8.01 17.99,8.01 17.89,8.06 17.79,8.11 17.69,8.14 17.59,8.17 17.48,8.2 17.38,8.21 17.28,8.22 17.17,8.23 17.07,8.22 16.96,8.22 16.86,8.2 16.76,8.18 16.81,8.14 16.87,8.1 16.92,8.06 16.98,8.02 17.03,7.98 17.08,7.94 17.14,7.9 17.19,7.86 17.3,7.78 17.35,7.74 17.41,7.7 17.53,7.61 17.66,7.53 17.78,7.44 17.9,7.36 18.03,7.27 18.15,7.19 18.28,7.1 18.4,7.02 18.53,6.94 18.66,6.85 18.78,6.77 18.91,6.69 19.04,6.61 19.16,6.53 19.29,6.45 19.42,6.37 19.55,6.29 19.68,6.21 19.81,6.13 19.94,6.05 20.06,5.98 20.19,5.9 20.32,5.82 20.45,5.75 20.59,5.67 20.72,5.59 20.85,5.52 20.98,5.44 21.11,5.37 21.24,5.3 21.38,5.22 21.51,5.15 21.64,5.08 21.77,5.01 21.91,4.94 22.04,4.86 22.18,4.79 22.31,4.72 22.45,4.66 22.58,4.59 22.72,4.52 22.85,4.45 22.99,4.38 23.12,4.31 23.26,4.25 23.4,4.18 23.53,4.12 23.67,4.05 23.76,4.01 23.85,3.97 23.94,3.93 24.03,3.88 24.12,3.84 24.21,3.8 24.31,3.76 24.4,3.72 24.49,3.68 24.58,3.64 24.67,3.6 24.76,3.56 24.73,3.66 24.69,3.76 24.65,3.85 24.6,3.94 24.54,4.03 24.48,4.11 24.42,4.2 24.34,4.27 24.18,4.42 24.09,4.48 24,4.54 24,4.54 24,4.54 24,4.54 24,4.54 23.99,4.54 23.99,4.54 23.99,4.54 23.99,4.54 23.99,4.54 23.99,4.54 23.99,4.54 23.99,4.54 23.99,4.54 23.99,4.54 23.99,4.54 23.99,4.54 23.99,4.54 23.99,4.54 23.99,4.54 23.99,4.54 23.99,4.54 23.99,4.54 23.99,4.54 23.99,4.54 23.99,4.54 23.79,4.66 23.62,4.81 23.49,4.98 23.35,5.16 23.26,5.36 23.2,5.56 23.15,5.77 23.13,5.99 23.16,6.21 23.19,6.42 23.26,6.64 23.37,6.84 23.78,7.55 24.6,8.96 25.01,9.67 25.01,9.67 25.01,9.68 25.01,9.68 25.02,9.69 25.02,9.69 25.02,9.69 25.03,9.7 25.03,9.7 25.04,9.71 25.04,9.72 25.04,9.72 25.17,9.93 25.24,10.16 25.27,10.39 25.3,10.62 25.28,10.86 25.22,11.08 25.16,11.3 25.06,11.51 24.92,11.69 24.78,11.88 24.6,12.04
CAP8
  Top 0.762: J1.8 22.04,32.31 arc-45 21.79,31.72 15.69,25.62 11.88,25.62
  pour Top: 12.11,25.14 11.85,25.59 11.68,25.77 11.49,25.92 11.3,26.07 11.08,26.17 10.84,26.24 10.61,26.3 10.37,26.32 10.13,26.29 9.88,26.26 9.64,26.18 9.42,26.05 8.66,25.61 7.9,25.17 7.15,24.74 6.39,24.3 6.39,24.3 6.39,24.3 6.39,24.3 6.38,24.3 6.17,24.18 5.95,24.11 5.72,24.08 5.5,24.05 5.27,24.07 5.05,24.13 4.83,24.19 4.63,24.29 4.44,24.42 4.26,24.56 4.1,24.74 3.98,24.95 3.98,24.95 3.98,24.94 3.98,24.94 3.98,24.94 3.91,25.06 3.83,25.17 3.74,25.26 3.65,25.35 3.56,25.44 3.45,25.51 3.35,25.58 3.23,25.64 3.12,25.68 3,25.73 2.88,25.76 2.76,25.79 2.76,25.78 2.76,25.77 2.76,25.77 2.77,25.76 2.77,25.76 2.77,25.75 2.77,25.75 2.78,25.74 2.78,25.73 2.78,25.73 2.78,25.72 2.79,25.72 2.85,25.58 2.91,25.44 2.97,25.3 3.03,25.16 3.09,25.02 3.15,24.88 3.22,24.74 3.28,24.6 3.35,24.47 3.41,24.33 3.48,24.19 3.54,24.05 3.61,23.92 3.67,23.78 3.74,23.65 3.81,23.51 3.88,23.37 3.94,23.24 4.01,23.1 4.08,22.97 4.15,22.83 4.22,22.7 4.29,22.57 4.36,22.43 4.44,22.3 4.51,22.17 4.58,22.03 4.65,21.9 4.73,21.77 4.8,21.64 4.88,21.5 4.95,21.37 5.03,21.24 5.1,21.11 5.18,20.98 5.33,20.72 5.41,20.59 5.57,20.33 5.64,20.21 5.72,20.08 5.8,19.95 5.88,19.82 5.96,19.69 6.05,19.57 6.13,19.44 6.29,19.19 6.37,19.06 6.46,18.94 6.54,18.81 6.63,18.68 6.71,18.56 6.8,18.44 6.88,18.31 6.97,18.19 7.05,18.07 7.14,17.94 7.23,17.82 7.27,17.76 7.31,17.7 7.35,17.65 7.4,17.59 7.44,17.53 7.48,17.47 7.52,17.42 7.57,17.36 7.61,17.3 7.65,17.25 7.7,17.19 7.74,17.13 7.78,17.25 7.82,17.38 7.83,17.5 7.85,17.63 7.86,17.76 7.85,17.88 7.84,18.01 7.82,18.14 7.78,18.27 7.74,18.39 7.69,18.51 7.62,18.63 7.62,18.63 7.62,18.63 7.62,18.64 7.62,18.64 7.62,18.64 7.62,18.64 7.62,18.64 7.62,18.64 7.62,18.64 7.62,18.64 7.62,18.64 7.62,18.64 7.62,18.64 7.62,18.64 7.62,18.64 7.62,18.64 7.62,18.64 7.62,18.64 7.62,18.64 7.62,18.64 7.62,18.64 7.62,18.64 7.62,18.64 7.62,18.64 7.62,18.65 7.49,18.86 7.42,19.08 7.39,19.31 7.36,19.54 7.38,19.77 7.44,19.98 7.5,20.2 7.6,20.41 7.74,20.59 7.87,20.77 8.05,20.93 8.26,21.06 9,21.48 9.75,21.91 10.49,22.34 11.23,22.77 11.24,22.77 11.24,22.78 11.25,22.78 11.25,22.78 11.26,22.78 11.26,22.78 11.27,22.79 11.28,22.79 11.28,22.79 11.29,22.79 11.29,22.8 11.3,22.8 11.52,22.93 11.71,23.1 11.85,23.29 12,23.49 12.11,23.71 12.23,24.17 12.25,24.41 12.22,24.66 12.19,24.9
CAP9
  Top 0.508: J1.9 19.5,33.58 arc-45 19.25,32.99
  Top 0.762: 19.25,32.99 14.42,28.16 9.68,28.16 arc-45 9.09,28.4 5.53,31.97 5.53,40.22
  pour Top: 5.23,44.2 1.65,44.2 1.65,44.2 1.65,44.21 1.65,44.21 1.44,44.21 1.24,44.25 1.06,44.32 0.88,44.39 0.71,44.49 0.56,44.62 0.41,44.74 0.29,44.9 0.19,45.07 0.1,45.24 0.03,45.42 0,45.62 0,39.23 0.03,39.43 0.1,39.61 0.2,39.78 0.29,39.95 0.42,40.1 0.56,40.23 0.71,40.36 0.88,40.46 1.06,40.53 1.24,40.6 1.44,40.64 2.47,40.64 4.1,40.64 4.92,40.64 4.93,40.64 4.93,40.64 4.94,40.63 4.94,40.63 4.95,40.63 4.95,40.63 4.96,40.63 4.96,40.63 4.97,40.63 4.98,40.63 4.98,40.63 4.99,40.63 5.23,40.63 5.47,40.68 5.68,40.77 5.9,40.86 6.09,40.99 6.25,41.15 6.41,41.31 6.54,41.51 6.63,41.72 6.72,41.93 6.77,42.17 6.77,42.66 6.72,42.9 6.54,43.33 6.41,43.52 6.25,43.68 6.09,43.84 5.9,43.97 5.68,44.06 5.47,44.15
CAP10
  Top 0.508: J1.10 16.96,33.58 arc-45 16.71,32.99
  Top 0.762: 16.71,32.99 13.78,30.06 10.32,30.06 arc-45 9.73,30.31 7.43,32.6 7.43,37.33 arc-45 7.68,37.93 11.24,41.49 11.24,58.64
  pour Top: 11.3,62.03 10.54,62.47 9.78,62.91 9.02,63.35 8.27,63.78 8.27,63.78 8.27,63.79 8.27,63.79 8.27,63.79 8.06,63.91 7.88,64.07 7.74,64.25 7.61,64.43 7.51,64.64 7.45,64.86 7.39,65.07 7.37,65.3 7.4,65.53 7.43,65.76 7.5,65.98 7.62,66.19 7.62,66.19 7.62,66.19 7.62,66.19 7.62,66.19 7.69,66.31 7.74,66.44 7.78,66.56 7.81,66.69 7.84,66.81 7.84,66.94 7.85,67.07 7.85,67.2 7.83,67.32 7.81,67.45 7.77,67.57 7.73,67.69 7.7,67.65 7.67,67.61 7.64,67.57 7.57,67.48 7.54,67.44 7.51,67.4 7.48,67.36 7.45,67.32 7.42,67.28 7.38,67.24 7.35,67.19 7.27,67.07 7.18,66.95 7.09,66.83 7.01,66.7 6.92,66.58 6.84,66.46 6.75,66.34 6.67,66.21 6.58,66.09 6.5,65.96 6.42,65.84 6.33,65.71 6.25,65.59 6.17,65.46 6.09,65.34 6.01,65.21 5.93,65.08 5.85,64.96 5.77,64.83 5.69,64.7 5.61,64.57 5.53,64.45 5.45,64.32 5.38,64.19 5.3,64.06 5.22,63.93 5.15,63.8 5.07,63.67 5,63.54 4.92,63.41 4.85,63.28 4.77,63.15 4.7,63.02 4.63,62.89 4.55,62.75 4.48,62.62 4.41,62.49 4.34,62.36 4.27,62.22 4.2,62.09 4.13,61.96 4.06,61.82 3.99,61.69 3.92,61.56 3.85,61.42 3.79,61.29 3.72,61.15 3.65,61.01 3.59,60.88 3.52,60.74 3.39,60.47 3.33,60.33 3.26,60.2 3.2,60.06 3.14,59.92 3.08,59.78 3.01,59.65 2.95,59.51 2.89,59.37 2.88,59.34 2.87,59.31 2.86,59.29 2.85,59.26 2.84,59.23 2.82,59.2 2.81,59.17 2.8,59.15 2.79,59.12 2.78,59.09 2.77,59.06 2.76,59.03 2.88,59.06 3,59.09 3.23,59.18 3.34,59.24 3.45,59.32 3.55,59.39 3.65,59.47 3.74,59.56 3.83,59.66 3.91,59.76 3.97,59.88 3.98,59.88 3.98,59.88 3.98,59.88 3.98,59.88 3.98,59.88 3.98,59.89 3.98,59.89 3.98,59.89 3.98,59.89 3.98,59.89 3.98,59.89 3.98,59.89 3.98,59.89 3.98,59.89 3.98,59.89 3.98,59.89 3.98,59.89 3.98,59.89 3.98,59.89 3.98,59.89 3.98,59.89 3.98,59.89 3.98,59.89 3.98,59.89 3.98,59.89 3.98,59.89 4.1,60.1 4.26,60.28 4.45,60.42 4.63,60.56 4.84,60.66 5.05,60.72 5.27,60.77 5.5,60.79 5.73,60.76 5.96,60.73 6.18,60.66 6.39,60.54 7.13,60.11 7.88,59.68 8.62,59.25 9.36,58.82 9.37,58.82 9.37,58.82 9.38,58.81 9.38,58.81 9.39,58.81 9.39,58.8 9.4,58.8 9.4,58.8 9.41,58.79 9.41,58.79 9.42,58.79 9.42,58.78 9.64,58.65 9.88,58.58 10.13,58.55 10.37,58.52 10.61,58.53 10.84,58.6 11.08,58.66 11.3,58.76 11.49,58.91 11.68,59.06 11.85,59.25 11.98,59.47 12.11,59.69 12.19,59.93 12.25,60.42 12.23,60.66 12.17,60.89 12.11,61.13 12,61.35 11.86,61.54 11.71,61.73 11.52,61.9
CAP11
  Top 0.508: J1.11 14.42,33.58 | 10.95,31.97 arc-45 10.36,32.21
  Top 0.762: 14.42,33.58 arc-45 14.17,32.99 13.15,31.97 10.95,31.97 | 10.36,32.21 9.34,33.24 9.34,36.7 arc-45 9.58,37.29 15.05,42.76 15.05,64.64 arc-45 15.3,65.23 22.67,72.61
  pour Top: 24.75,81.26 24.67,81.23 24.59,81.19 24.5,81.15 24.42,81.12 24.34,81.08 24.25,81.05 24.17,81.01 24.09,80.97 24.01,80.94 23.92,80.9 23.84,80.86 23.76,80.82 23.62,80.76 23.49,80.69 23.35,80.63 23.22,80.56 23.08,80.5 22.95,80.43 22.81,80.36 22.68,80.3 22.54,80.23 22.41,80.16 22.27,80.09 22.14,80.02 22.01,79.95 21.87,79.88 21.74,79.81 21.61,79.74 21.48,79.66 21.21,79.52 21.08,79.45 20.95,79.37 20.82,79.3 20.69,79.22 20.43,79.07 20.3,79 20.04,78.84 19.91,78.77 19.78,78.69 19.66,78.61 19.53,78.53 19.4,78.45 19.27,78.37 19.15,78.29 19.02,78.21 18.89,78.13 18.77,78.05 18.64,77.97 18.52,77.89 18.39,77.8 18.14,77.64 18.02,77.55 17.89,77.47 17.77,77.38 17.65,77.3 17.52,77.21 17.46,77.17 17.39,77.12 17.33,77.07 17.26,77.03 17.2,76.98 17.14,76.93 17.07,76.89 17.01,76.84 16.94,76.79 16.88,76.74 16.81,76.7 16.75,76.65 16.85,76.62 16.95,76.61 17.06,76.6 17.16,76.6 17.27,76.6 17.37,76.62 17.48,76.63 17.58,76.65 17.68,76.69 17.78,76.72 17.88,76.77 17.98,76.82 17.98,76.82 17.98,76.82 17.98,76.82 17.98,76.82 17.98,76.83 17.98,76.83 17.98,76.83 17.98,76.83 17.99,76.83 17.99,76.83 17.99,76.83 17.99,76.83 17.99,76.83 17.99,76.83 17.99,76.83 17.99,76.83 17.99,76.83 17.99,76.83 17.99,76.83 17.99,76.83 17.99,76.83 17.99,76.83 17.99,76.83 17.99,76.83 17.99,76.83 17.99,76.83 18.19,76.95 18.41,77.02 18.62,77.04 18.84,77.07 19.06,77.05 19.27,77 19.47,76.94 19.67,76.85 19.85,76.72 20.02,76.58 20.17,76.42 20.29,76.21 20.7,75.51 21.1,74.8 21.51,74.09 21.92,73.38 21.92,73.38 21.93,73.37 21.93,73.37 21.93,73.36 21.93,73.36 21.93,73.35 21.94,73.35 21.94,73.34 21.94,73.34 21.94,73.33 21.95,73.33 21.95,73.32 22.07,73.11 22.23,72.93 22.42,72.79 22.6,72.65 22.81,72.55 23.03,72.49 23.25,72.43 23.49,72.42 23.72,72.44 23.95,72.47 24.18,72.55 24.39,72.67 24.6,72.79 24.78,72.95 24.92,73.14 25.06,73.32 25.16,73.53 25.28,73.98 25.3,74.21 25.27,74.44 25.24,74.67 25.17,74.9 25.04,75.11 24.63,75.83 24.21,76.56 23.79,77.28 23.38,78 23.38,78 23.38,78 23.38,78 23.38,78 23.27,78.2 23.2,78.42 23.17,78.63 23.14,78.85 23.16,79.07 23.21,79.27 23.27,79.48 23.36,79.68 23.49,79.85 23.63,80.03 23.79,80.18 23.99,80.29 23.99,80.29 23.99,80.29 23.99,80.29 23.99,80.29 24.09,80.35 24.18,80.41 24.25,80.48 24.33,80.55 24.41,80.63 24.47,80.71 24.53,80.8 24.59,80.89 24.64,80.98 24.68,81.07 24.72,81.16
CAP12
  Top 0.762: J1.12 16.71,39.34 arc45 16.96,39.93 16.96,62.45 31.95,77.44 arc-45 32.54,77.69 41.09,77.69
  pour Top: 45.63,84.66 45.47,84.67 45.31,84.69 45.15,84.7 44.99,84.71 44.83,84.72 44.67,84.74 44.52,84.75 44.36,84.76 44.2,84.76 44.04,84.77 43.88,84.78 43.72,84.79 43.56,84.8 43.4,84.8 43.23,84.81 43.07,84.81 42.91,84.82 42.75,84.82 42.59,84.82 42.43,84.83 42.27,84.83 42.11,84.83 41.94,84.83 41.62,84.83 41.46,84.83 41.3,84.83 41.14,84.83 40.98,84.83 40.82,84.82 40.66,84.82 40.5,84.81 40.34,84.81 40.18,84.8 40.02,84.8 39.86,84.79 39.7,84.78 39.54,84.77 39.38,84.77 39.22,84.76 39.06,84.75 38.91,84.74 38.75,84.73 38.59,84.71 38.43,84.7 38.27,84.69 38.12,84.68 37.96,84.66 37.9,84.66 37.84,84.65 37.79,84.65 37.73,84.64 37.67,84.63 37.62,84.63 37.56,84.62 37.5,84.62 37.44,84.61 37.39,84.61 37.33,84.6 37.27,84.59 37.35,84.54 37.42,84.49 37.5,84.44 37.58,84.4 37.66,84.36 37.75,84.33 37.84,84.29 37.93,84.27 38.02,84.25 38.12,84.24 38.21,84.23 38.31,84.23 38.31,84.23 38.31,84.23 38.31,84.23 38.31,84.23 38.31,84.23 38.31,84.23 38.31,84.23 38.32,84.23 38.32,84.23 38.32,84.23 38.32,84.23 38.32,84.23 38.32,84.23 38.32,84.23 38.32,84.23 38.32,84.23 38.32,84.23 38.32,84.23 38.55,84.23 38.78,84.18 38.98,84.09 39.18,84.01 39.36,83.89 39.51,83.73 39.66,83.58 39.79,83.4 39.87,83.2 39.96,83 40,82.78 40,79.28 40,79.27 40,79.27 40,79.26 40,79.26 40,79.25 40,79.25 40,79.24 40,79.23 40,79.23 40,79.22 40,79.22 40,78.97 40.05,78.73 40.23,78.3 40.36,78.11 40.68,77.79 40.87,77.66 41.3,77.48 41.54,77.43 42.03,77.43 42.26,77.48 42.69,77.66 42.89,77.79 43.05,77.95 43.21,78.11 43.34,78.3 43.43,78.52 43.52,78.73 43.57,78.97 43.57,82.55 43.58,82.55 43.58,82.78 43.62,83 43.71,83.2 43.79,83.4 43.92,83.58 44.07,83.73 44.22,83.88 44.4,84.01 44.6,84.09 44.8,84.18 45.02,84.23 45.25,84.23 45.25,84.23 45.35,84.23 45.44,84.24 45.54,84.25 45.63,84.27 45.72,84.3 45.81,84.33 45.89,84.36 45.97,84.4 46.05,84.44 46.13,84.49 46.21,84.54 46.28,84.59 46.23,84.6 46.17,84.61 46.12,84.61 46.06,84.62 46.01,84.62 45.95,84.63 45.9,84.63 45.85,84.64 45.79,84.64 45.74,84.65 45.68,84.66
GND
  Top 0.762: 46.11,62.39 arc45 PWR.2
  Top 1.016: PWR.2 arc-45 46.29,62.58 | C3.1 52.14,63.47 | 62.04,56.15 arc45 JP6.1 | 62.17,52.89 arc45 62.42,52.29
  Top 1.27: JP5.1 JP9.1 34.49,60.93 arc-45 35.08,61.18 44.9,61.18 46.11,62.39 | 46.29,62.58 C3.1 C2.1 | 52.14,63.47 arc-45 52.73,63.72 7805.2 57.89,63.72 arc-45 58.48,63.47 62.04,59.91 62.04,56.15 | JP6.1 62.17,52.89 | 62.42,52.29 JP3.1
IRQ
  Top 1.27: JP2.1 JP7.1
SCL
  Top 1.27: JP2.2 JP7.2
SDA
  Top 1.27: JP2.3 JP7.3
VIN
  Top 1.016: 47.32,68.68 arc-45 47.91,68.93
  Top 1.27: PWR.1 47.32,68.68 | 47.91,68.93 C2.2 53.31,68.93 arc-45 53.9,68.68 7805.1

## Text on the board
tPlace: PWR | + | -